# EAGLE board RODAR (EAGLE 9.7.0)

Size 197.93 x 109.78 mm. Coordinates in mm from the lower left corner, seen from the top.
Outline: 0,0 197.93,0 197.93,109.78 0,109.78 0,0
Copper layers (1*16): Top 0.035mm / dielectric 1.5mm / Bottom 0.035mm
Design rules "default": minimum track width 6mil, minimum drill 0.35mm, track to track 6mil, track to pad 6mil, pad to pad 6mil, via to via 6mil, smd to smd 6mil, copper to edge 40mil, drill to drill 6mil, minimum pad ring 10mil, minimum via ring 8mil, stop-mask expansion 4mil, vias tented up to drill 0mil, thermal gap 10mil

## Footprints (pad centres in the part's own frame; a part is rotated, then mirrored left to right if it is on the bottom)
MOTOR = drill 1.118 pad 3.15 octagon: + 2.54,0; - -2.54,0
RESAD1016W63L850D250B = drill 0.83 pad 1.43: 1 -5.08,0; 2 5.08,0
SWITCH-MOMENTARY-PTH-6.5MM = drill 1.016 pad 1.88: 1 -3.251,2.261; 2 3.251,2.261; 3 -3.251,-2.261; 4 3.251,-2.261
TO92 = drill 0.813 octagon: 1 -1.27,0; 2 0,1.905; 3 1.27,0
ARDUINO-UNO-R3-SHIELD = drill 1.016 pad 1.88: 3.3V 24.13,-2.54; 5V 24.13,0; A0 24.13,12.7; A1 24.13,15.24; A2 24.13,17.78; A3 24.13,20.32; A4 24.13,22.86; A5 24.13,25.4; AREF -24.13,-13.97; D2 -24.13,20.32; D3 -24.13,17.78; D4 -24.13,15.24; D5 -24.13,12.7; D6 -24.13,10.16; D7 -24.13,7.62; D8 -24.13,3.81; D9 -24.13,1.27; D10 -24.13,-1.27; D11 -24.13,-3.81; D12 -24.13,-6.35; D13 -24.13,-8.89; GND@0 24.13,2.54; GND@1 24.13,5.08; GND@2 -24.13,-11.43; IOREF 24.13,-7.62; NC 24.13,-10.16; RES 24.13,-5.08; RX -24.13,25.4; SCL -24.13,-19.05; SDA -24.13,-16.51; TX -24.13,22.86; VIN 24.13,7.62

## Placement (x,y rotation side)
MMOTOR_DIREITO  MOTOR_HDR  [MOTOR]  106.55,95.1 0 top
MMOTOR_ESQUERDO  MOTOR_HDR  [MOTOR]  79.26,95.57 0 top
R1  1k  [RESAD1016W63L850D250B]  127.32,38.64 0 top
R2  1k  [RESAD1016W63L850D250B]  117.16,20.86 0 top
R3  1k  [RESAD1016W63L850D250B]  150.18,20.86 0 top
R4  1k  [RESAD1016W63L850D250B]  152.72,38.64 0 top
R5  1k  [RESAD1016W63L850D250B]  143.58,101.15 0 top
R6  1k  [RESAD1016W63L850D250B]  141.04,78.29 0 top
R7  1k  [RESAD1016W63L850D250B]  184.22,101.15 0 top
R8  1k  [RESAD1016W63L850D250B]  179.14,78.29 0 top
S1  SWITCH_MOMENTARY  [SWITCH-MOMENTARY-PTH-6.5MM]  142.56,32.29 90 top
S3  SWITCH_MOMENTARY  [SWITCH-MOMENTARY-PTH-6.5MM]  133.42,89.72 90 top
S4  SWITCH_MOMENTARY  [SWITCH-MOMENTARY-PTH-6.5MM]  171.52,89.72 90 top
S5  SWITCH_MOMENTARY  [SWITCH-MOMENTARY-PTH-6.5MM]  109.54,32.29 90 top
T1  NPN  [TO92]  134.94,46.26 0 top
T2  NPN  [TO92]  160.34,43.72 0 top
T3  NPN  [TO92]  191.84,103.69 0 top
T4  NPN  [TO92]  151.2,103.69 0 top
U1  ARDUINO-UNO-R3-SHIELD  [ARDUINO-UNO-R3-SHIELD]  47.88,29.84 270 top

## Library data of the parts
MMOTOR_DIREITO MMOTOR_ESQUERDO R1-R8 S1 S3-S5 U1 = Tinkercad
T1-T4 = Tinkercad; CATEGORY: Transistor; SUB-CATEGORY: BJT; TYPE: NPN

## Nets
MMOTOR_DIREITO_+: MMOTOR_DIREITO.+ MMOTOR_ESQUERDO.+ R1.1
R8_2: R6.2 R8.2
S4_1: S3.1 S3.2 S4.1 S4.2
T1_C: R1.2 T1.1
T2_C: R4.2 T2.1
T3_C: R7.2 T3.1
T4_C: R5.2 T4.1
U1_5V: R2.2 R3.2 U1.5V
U1_D2: R2.1 S5.3 S5.4 U1.D2
U1_D3: T1.2 U1.D3
U1_D4: R3.1 S1.3 S1.4 U1.D4
U1_D5: T2.2 U1.D5
U1_D6: R6.1 S3.3 S3.4 U1.D6
U1_D7: T4.2 U1.D7
U1_D8: R8.1 S4.3 S4.4 U1.D8
U1_D9: T3.2 U1.D9
U1_GND: MMOTOR_DIREITO.- MMOTOR_ESQUERDO.- R4.1 S1.1 S1.2 S5.1 S5.2 U1.GND@0 U1.GND@1 U1.GND@2

## Tracks (layer width: path | path; a pad name or v marks a point on that pad's centre or on a via)
MMOTOR_DIREITO_+  (2 unrouted)
R8_2  (1 unrouted)
S4_1  (3 unrouted)
T1_C  (1 unrouted)
T2_C  (1 unrouted)
T3_C  (1 unrouted)
T4_C  (1 unrouted)
U1_5V  (2 unrouted)
U1_D2  (3 unrouted)
U1_D3  (1 unrouted)
U1_D4  (3 unrouted)
U1_D5  (1 unrouted)
U1_D6  (3 unrouted)
U1_D7  (1 unrouted)
U1_D8  (3 unrouted)
U1_D9  (1 unrouted)
U1_GND  (9 unrouted)